# Altium PCB EmphaseMainBoard.PcbDoc (part 2 of 2)
Units mm, origin at the board's own origin, x right, y up, seen from the top; angles counter-clockwise.
Board outline 150 x 110 mm, 2 copper layers (Top Layer, Bottom Layer); 138 components, 156 nets, 586 pads, 141 vias.
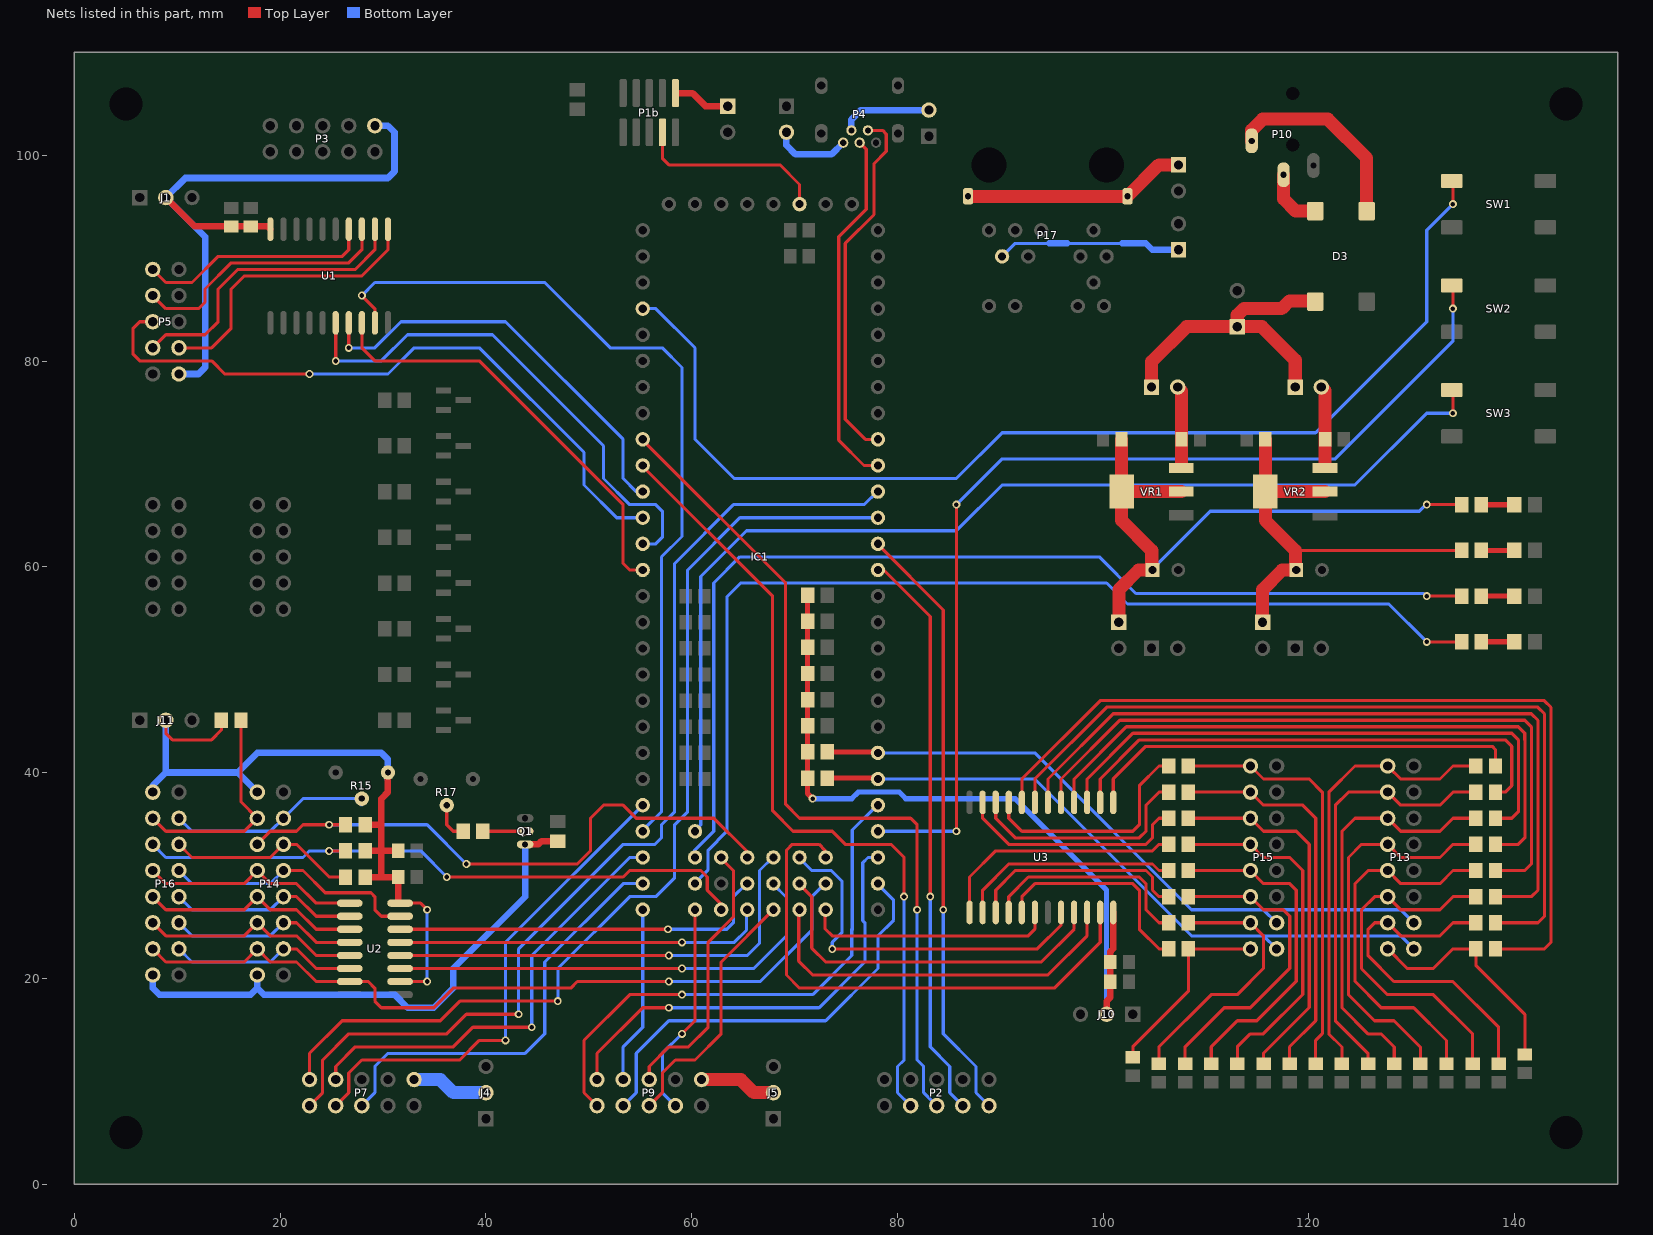
[diagram p2: the nets of this part, all layers, seen from the top]

## Via types
v1: diameter 0.762, hole 0.457, Top Layer to Bottom Layer, 139 vias
v2: diameter 1.27, hole 0.762, Top Layer to Bottom Layer, 1 vias
v3: diameter 0.457, hole 0.457, Top Layer to Bottom Layer, 1 vias

## Nets (pads, with @x,y where several pads share a name; then routed paths per layer and width w, separated by ;. In a path a pad name is that pad's centre, name@x,y a point inside that pad or via, vN(x,y) a via of type N, cw(c..) or ccw(c..) an arc to the next point about the centre after c; other vN are vias at no path point) (continued)
KEY_6: IC1.48 P13.14 P15.14 R7.2 | length 65.5
  Top Layer w0.508: R7.2@73.165,42.005 IC1.48@77.93,42.005
  Bottom Layer w0.305: IC1.48@78.105,41.91 93.345,41.91 108.585,26.67 115.57,26.67 ; P15.14@116.855,25.4 116.84,25.4 115.57,26.67 ; P13.14@130.19,25.4 128.92,26.67 115.57,26.67
KEY_7: IC1.49 P13.16 P15.16 R9.2 | length 65.5
  Top Layer w0.508: R9.2@73.165,39.465 IC1.49@77.93,39.465
  Bottom Layer w0.305: IC1.49@78.105,39.37 93.345,39.37 108.585,24.13 115.57,24.13 ; P15.16@116.855,22.86 116.84,22.86 115.57,24.13 ; P13.16@130.19,22.86 128.92,24.13 115.57,24.13
LCD1_E: IC1.66 P14.12 R22.2 | length 58.2
  Top Layer w0.305: P14.12@17.78,33.02 19.05,34.29 21.59,34.29 22.225,34.925 v1(24.765,34.925) R22.2@26.355,34.925 ; v1(38.1,31.115) 48.895,31.115 50.165,32.385 50.165,35.56 51.435,36.83 53.34,36.83 54.61,35.56 62.15,35.56 65.325,32.385 IC1.66@65.325,31.75
  Bottom Layer w0.305: v1(24.765,34.925) 34.29,34.925 v1(38.1,31.115)
LCD2_E: IC1.67 P16.12 R21.2 | length 61.6
  Top Layer w0.305: v1(24.765,32.385) R21.2@26.355,32.385 ; v1(36.195,29.845) 53.34,29.845 53.975,30.48 60.88,30.48 61.515,29.845 61.515,28.575 62.785,27.305 IC1.67@62.785,26.67
  Bottom Layer w0.305: P16.12@7.62,33.02 8.89,31.75 22.225,31.75 22.86,32.385 v1(24.765,32.385) 33.655,32.385 v1(36.195,29.845)
LCD_B-: P14.2 P16.2 Q1.1 R14.1 | length 54
  Top Layer w0.635: Q1.1@43.815,33.02 45.085,33.02 45.405,33.34 R14.1@46.99,33.34
  Bottom Layer w0.635: P16.2@7.62,20.32 7.62,19.05 8.255,18.415 17.145,18.415 17.78,19.05 ; P14.2@17.78,20.32 17.78,19.05 ; Q1.1@43.815,33.02 43.815,27.94 36.83,20.955 36.83,19.05 34.925,17.145 32.385,17.145 31.115,18.415 18.415,18.415 17.78,19.05
LCD_D0: P14.9 P16.9 U2.15 | length 25.1
  Top Layer w0.305: P14.9@20.32,30.48 22.225,30.48 24.384,28.321 28.829,28.321 29.21,27.94 29.21,26.67 29.845,26.035 U2.15@31.66,26.035
  Bottom Layer w0.305: P16.9@10.16,30.48 11.43,29.21 19.05,29.21 P14.9@20.32,30.48
LCD_D1: P14.10 P16.10 U2.1 | length 21.5
  Top Layer w0.305: P16.10@7.62,30.48 8.89,29.21 16.51,29.21 P14.10@17.78,30.48 19.05,29.21 21.59,29.21 23.495,27.305 U2.1@26.76,27.305
LCD_D2: P14.7 P16.7 U2.2 | length 18.4
  Top Layer w0.305: P14.7@20.32,27.94 21.59,27.94 23.495,26.035 U2.2@26.76,26.035
  Bottom Layer w0.305: P16.7@10.16,27.94 11.43,26.67 19.05,26.67 P14.7@20.32,27.94
LCD_D3: P14.8 P16.8 U2.3 | length 21.5
  Top Layer w0.305: P16.8@7.62,27.94 8.89,26.67 16.51,26.67 P14.8@17.78,27.94 19.05,26.67 21.59,26.67 23.495,24.765 U2.3@26.76,24.765
LCD_D4: P14.5 P16.5 U2.4 | length 18.4
  Top Layer w0.305: P14.5@20.32,25.4 21.59,25.4 23.495,23.495 U2.4@26.76,23.495
  Bottom Layer w0.305: P16.5@10.16,25.4 11.43,24.13 19.05,24.13 P14.5@20.32,25.4
LCD_D5: P14.6 P16.6 U2.5 | length 21.5
  Top Layer w0.305: P16.6@7.62,25.4 8.89,24.13 16.51,24.13 P14.6@17.78,25.4 19.05,24.13 21.59,24.13 23.495,22.225 U2.5@26.76,22.225
LCD_D6: P14.3 P16.3 U2.6 | length 18.4
  Top Layer w0.305: P14.3@20.32,22.86 21.59,22.86 23.495,20.955 U2.6@26.76,20.955
  Bottom Layer w0.305: P16.3@10.16,22.86 11.43,21.59 19.05,21.59 P14.3@20.32,22.86
LCD_D7: IC1.56 P14.4 P16.4 U2.7 | length 76.4
  Top Layer w0.305: P16.4@7.62,22.86 8.89,21.59 16.51,21.59 P14.4@17.78,22.86 19.05,21.59 21.59,21.59 23.495,19.685 U2.7@26.76,19.685 28.575,19.685 29.21,19.05 29.21,17.78 29.845,17.145 34.925,17.145 36.83,19.05 48.26,19.05 48.895,19.685 v1@57.705,19.685
  Bottom Layer w0.305: v1@57.705,19.685 v1(57.785,19.685) 66.675,19.685 71.675,24.685 71.675,27.94 IC1.56@72.945,29.21
LCD_DRIVER_CL: IC1.62 U2.11 | length 44.4
  Top Layer w0.305: U2.11@31.75,20.955 v1(59.055,20.955)
  Bottom Layer w0.305: v1(59.055,20.955) 66.04,20.955 69.215,24.13 69.215,27.86 IC1.62@67.865,29.21
LCD_DRIVER_OD: IC1.65 U2.14 | length 37
  Top Layer w0.305: U2.14@31.66,24.765 v1(57.705,24.765)
  Bottom Layer w0.305: v1(57.705,24.765) 63.42,24.765 64.055,25.4 64.055,27.94 IC1.65@65.325,29.21
LCD_DRIVER_OE: IC1.64 U2.13 | length 36.1
  Top Layer w0.305: U2.13@31.66,23.495 v1@58.975,23.495
  Bottom Layer w0.305: v1@58.975,23.495 v1(59.055,23.495) 64.135,23.495 65.325,24.685 IC1.64@65.325,26.67
LCD_DRIVER_OS: IC1.63 U2.12 | length 44.3
  Top Layer w0.305: U2.12@31.66,22.225 v1(57.785,22.225)
  Bottom Layer w0.305: v1(57.785,22.225) 65.405,22.225 66.595,23.415 66.595,30.48 IC1.63@67.865,31.75
LCD_RS: P14.14 P16.14 R20.2 | length 21.4
  Top Layer w0.305: P16.14@7.62,35.56 8.89,34.29 16.51,34.29 P14.14@17.78,35.56 16.19,37.15 R20.2@16.19,45.085
LCD_RW: P14.11 P16.11 R19.2 | length 18.6
  Top Layer w0.305: P16.11@10.16,33.02 11.43,31.75 19.05,31.75 P14.11@20.32,33.02 21.59,33.02 24.765,29.845 R19.2@26.355,29.845
LCD_V0: P14.13 P16.13 R15.W | length 19.9
  Bottom Layer w0.305: P16.13@10.16,35.56 11.43,34.29 19.05,34.29 P14.13@20.32,35.56 22.225,37.465 27.305,37.465 R15.W@27.94,36.83
LINE_0: R23.2 U3.1 | length 42.5
  Top Layer w0.305: U3.1@100.98,37.1 100.98,39.385 104.14,42.545 137.81,42.545 137.81,42.54 138.125,42.225 R23.2@138.125,40.64
LINE_1: R24.2 U3.2 | length 49.8
  Top Layer w0.305: U3.2@99.71,37.1 99.71,39.37 103.52,43.18 139.08,43.18 139.715,42.545 139.715,38.735 139.08,38.1 R24.2@138.125,38.1
LINE_2: R25.2 U3.3 | length 55.8
  Top Layer w0.305: U3.3@98.44,37.1 98.44,39.37 102.885,43.815 139.715,43.815 140.35,43.18 140.35,36.195 139.715,35.56 R25.2@138.125,35.56
LINE_3: R26.2 U3.4 | length 61.7
  Top Layer w0.305: U3.4@97.17,37.1 97.17,39.37 102.25,44.45 140.335,44.45 140.97,43.815 140.97,43.18 140.985,43.165 140.985,33.655 140.35,33.02 R26.2@138.125,33.02
LINE_4: R27.2 U3.5 | length 67.7
  Top Layer w0.305: U3.5@95.9,37.1 95.9,39.37 101.615,45.085 140.97,45.085 141.62,44.435 141.62,31.115 140.985,30.48 R27.2@138.125,30.48
LINE_5: R28.2 U3.6 | length 73.7
  Top Layer w0.305: U3.6@94.63,37.1 94.63,39.37 100.98,45.72 141.605,45.72 142.255,45.07 142.255,28.575 141.62,27.94 R28.2@138.125,27.94
LINE_6: R29.2 U3.7 | length 79.7
  Top Layer w0.305: U3.7@93.36,37.1 93.36,39.37 100.345,46.355 142.24,46.355 142.89,45.705 142.89,26.035 142.255,25.4 R29.2@138.125,25.4
LINE_7: R30.2 U3.8 | length 85.6
  Top Layer w0.305: U3.8@92.09,37.1 92.09,39.37 99.71,46.99 142.875,46.99 143.525,46.34 143.525,23.495 142.89,22.86 R30.2@138.125,22.86
LINE_8: R31.2 U3.9 | length 22.2
  Top Layer w0.305: U3.9@90.82,36.83 90.82,35.56 92.09,34.29 102.885,34.29 103.52,34.925 103.52,38.735 105.425,40.64 R31.2@106.38,40.64
LINE_9: R32.2 U3.10 | length 22.5
  Top Layer w0.305: U3.10@89.55,37.1 89.55,35.56 91.455,33.655 103.52,33.655 104.155,34.29 104.155,36.83 105.425,38.1 R32.2@106.38,38.1
LINE_10: R33.2 U3.11 | length 22.5
  Top Layer w0.305: U3.11@88.28,37.1 88.28,35.56 90.82,33.02 104.155,33.02 104.79,33.655 104.79,34.925 105.425,35.56 R33.2@106.38,35.56
LINE_11: R34.2 U3.13 | length 24.1
  Top Layer w0.305: U3.13@87.01,26.4 87.01,29.845 89.55,32.385 104.79,32.385 105.425,33.02 R34.2@106.38,33.02
LINE_12: R35.2 U3.14 | length 21.6
  Top Layer w0.305: U3.14@88.28,26.4 88.28,28.575 90.82,31.115 104.79,31.115 105.425,30.48 R35.2@106.38,30.48
LINE_13: R36.2 U3.15 | length 21.6
  Top Layer w0.305: U3.15@89.55,26.4 89.55,28.575 91.455,30.48 104.155,30.48 104.79,29.845 104.79,28.575 105.425,27.94 R36.2@106.38,27.94
LINE_14: R37.2 U3.16 | length 21.2
  Top Layer w0.305: U3.16@90.82,26.4 90.82,27.94 92.725,29.845 103.52,29.845 104.155,29.21 104.155,26.67 105.425,25.4 R37.2@106.38,25.4
LINE_15: R38.2 U3.17 | length 21.2
  Top Layer w0.305: U3.17@92.09,26.4 92.09,27.94 93.36,29.21 102.885,29.21 103.52,28.575 103.52,24.765 105.425,22.86 R38.2@106.38,22.86
LINE_A: IC1.57 U3.23 | length 52.8
  Top Layer w0.305: IC1.57@72.945,31.75 72.945,32.465 72.39,33.02 69.77,33.02 69.215,32.465 69.215,20.32 70.485,19.05 95.25,19.05 99.71,23.51 U3.23@99.71,26.4
LINE_B: IC1.58 U3.22 | length 37.4
  Top Layer w0.305: IC1.58@70.405,26.67 70.405,21.67 71.755,20.32 94.615,20.32 98.44,24.145 U3.22@98.44,26.4
LINE_C: IC1.59 U3.21 | length 35.8
  Top Layer w0.305: IC1.59@70.405,29.21 71.675,27.94 71.675,22.94 73.025,21.59 93.98,21.59 97.17,24.78 U3.21@97.17,26.4
LINE_D: IC1.60 U3.20 | length 36.6
  Top Layer w0.305: v1(73.66,22.86) 93.599,22.86 95.9,25.161 U3.20@95.9,26.4
  Bottom Layer w0.305: IC1.60@70.405,31.75 71.675,30.48 73.58,30.48 74.596,29.464 74.596,24.431 73.66,23.495 v1(73.66,22.86)
LINE_EN/DIS: IC1.55 U3.18 | length 24.4
  Top Layer w0.305: IC1.55@72.945,26.67 72.945,24.845 73.66,24.13 92.71,24.13 93.36,24.78 U3.18@93.36,26.4
NetC3_2: C3.2 C4.2 J1.2 P3.10 P5.10 U1.20 | length 61.6
  Top Layer w0.635: J1.2@8.89,95.885 11.695,93.08 C4.2@15.24,93.08 C3.2@17.145,93.08 18.785,93.08 U1.20@19.05,92.815
  Bottom Layer w0.635: P5.10@10.16,78.74 12.065,78.74 12.7,79.375 12.7,92.075 J1.2@8.89,95.885 10.795,97.79 30.48,97.79 31.115,98.425 31.115,102.235 30.48,102.87 P3.10@29.21,102.87
NetC11_2: C11.2 J6.2 VR1.3 | length 7.8
  Top Layer w1.27: J6.2@107.235,77.47 107.605,77.1 C11.2@107.605,72.39 VR1.3@107.605,69.85
NetC12_2: C12.2 C14.1 J7.1 R13.2 VR1.2 VR1.4 | length 59.6
  Top Layer w0.305: v1@131.365,66.04 v1(131.445,66.04) R13.2@134.86,66.04
  Top Layer w1.27: J7.1@101.52,54.61 101.52,57.785 103.425,59.69 104.715,59.69 104.715,61.575 101.795,64.495 VR1.4@101.795,67.31 ; C12.2@101.785,72.39 101.785,67.32 VR1.4@101.795,67.31 ; VR1.2@107.595,67.31 VR1.4@101.795,67.31
  Bottom Layer w0.305: C14.1@104.715,59.71 110.41,65.405 130.73,65.405 v1@131.365,66.04
NetC13_1: C13.1 D3.1 J6.1 J8.1 | length 31.1
  Top Layer w1.27: J6.1@104.695,77.47 104.695,79.93 108.105,83.34 C13.1@113.03,83.34 ; J8.1@118.665,77.47 118.665,80.09 115.415,83.34 C13.1@113.03,83.34 ; D3.1@120.65,85.852 118.11,85.852 117.348,85.09 113.665,85.09 113.03,84.455 C13.1@113.03,83.34
NetC17_2: C17.2 J8.2 VR2.3 | length 7.8
  Top Layer w1.27: J8.2@121.205,77.47 121.565,77.11 VR2.3@121.565,69.85
NetC18_2: C18.2 C20.1 J9.1 R18.2 VR2.2 VR2.4 | length 43.1
  Top Layer w0.305: 118.685,61.575 118.705,61.595 R18.2@134.86,61.595
  Top Layer w1.27: J9.1@115.49,54.61 115.49,57.785 117.395,59.69 118.685,59.69 118.685,61.575 115.765,64.495 VR2.4@115.765,67.31 ; C18.2@115.755,72.39 115.765,72.38 VR2.4@115.765,67.31 ; VR2.2@121.565,67.31 VR2.4@115.765,67.31
NetC23_2: C23.2 P13.1 R23.1 | length 43.3
  Top Layer w0.305: C23.2@123.205,11.695 123.205,13.32 121.935,14.59 121.935,38.1 124.475,40.64 P13.1@127.65,40.64 ; P13.1@127.65,40.473 127.817,40.473 128.92,39.37 132.73,39.37 134,40.64 R23.1@136.225,40.64
NetC24_2: C24.2 P13.3 R24.1 | length 41.7
  Top Layer w0.305: C24.2@125.745,11.695 125.745,12.685 122.57,15.86 122.57,36.83 123.84,38.1 P13.3@127.65,38.1 128.92,36.83 132.73,36.83 134,38.1 R24.1@136.225,38.1
NetC25_2: C25.2 P13.5 R25.1 | length 40
  Top Layer w0.305: C25.2@128.285,11.695 128.285,13.32 127,14.605 125.73,14.605 123.205,17.13 123.205,34.29 124.475,35.56 P13.5@127.65,35.56 128.92,34.29 132.73,34.29 134,35.56 R25.1@136.225,35.56
NetC26_2: C26.2 P13.7 R26.1 | length 38
  Top Layer w0.305: C26.2@130.825,11.695 130.825,13.32 128.27,15.875 126.365,15.875 123.84,18.4 123.84,31.75 125.11,33.02 P13.7@127.65,33.02 128.92,31.75 132.73,31.75 134,33.02 R26.1@136.225,33.02
NetC27_2: C27.2 P13.9 R27.1 | length 36.4
  Top Layer w0.305: C27.2@133.365,11.695 133.365,13.955 130.175,17.145 127.03,17.145 124.475,19.7 124.475,29.21 125.745,30.48 P13.9@127.65,30.48 128.92,29.21 132.73,29.21 134,30.48 R27.1@136.225,30.48
NetC28_2: C28.2 P13.11 R28.1 | length 34.7
  Top Layer w0.305: C28.2@135.905,11.695 135.905,14.59 132.08,18.415 127.635,18.415 125.11,20.94 125.11,26.67 126.38,27.94 P13.11@127.65,27.94 128.92,26.67 132.73,26.67 134,27.94 R28.1@136.225,27.94
NetC29_2: C29.2 P13.13 R29.1 | length 33.7
  Top Layer w0.305: R29.1@136.225,25.4 134,25.4 132.73,24.13 128.92,24.13 P13.13@127.65,25.4 126.38,25.4 125.745,24.765 125.745,22.195 128.255,19.685 133.985,19.685 138.43,15.24 C29.2@138.43,11.43
NetC30_2: C30.2 P13.15 R30.1 | length 22.4
  Top Layer w0.305: P13.15@127.65,22.86 129.555,20.955 132.095,20.955 134,22.86 R30.1@136.225,22.86 136.225,21.255 140.985,16.495 C30.2@140.985,12.595
NetC31_2: C31.2 P15.1 R31.1 | length 40.8
  Top Layer w0.305: R31.1@108.28,40.64 P15.1@114.315,40.64 115.585,39.37 120.03,39.37 121.3,38.1 121.3,14.62 120.65,13.97 120.65,11.71 C31.2@120.665,11.695
NetC32_2: C32.2 P15.3 R32.1 | length 38.4
  Top Layer w0.305: R32.1@108.28,38.1 P15.3@114.315,38.1 115.585,36.83 119.395,36.83 120.665,35.56 120.665,15.89 118.11,13.335 118.11,11.71 C32.2@118.125,11.695
NetC33_2: C33.2 P15.5 R33.1 | length 36
  Top Layer w0.305: R33.1@108.28,35.56 P15.5@114.315,35.56 115.585,34.29 118.76,34.29 120.03,33.02 120.03,17.16 115.585,12.715 C33.2@115.585,11.695
NetC34_2: C34.2 P15.7 R34.1 | length 34.3
  Top Layer w0.305: R34.1@108.28,33.02 P15.7@114.315,33.02 115.585,31.75 118.125,31.75 119.395,30.48 119.395,18.43 115.57,14.605 114.3,14.605 113.045,13.35 C34.2@113.045,11.695
NetC35_2: C35.2 P15.9 R35.1 | length 32.7
  Top Layer w0.305: R35.1@108.28,30.48 P15.9@114.315,30.48 115.585,29.21 118.125,29.21 118.76,28.575 118.76,19.7 114.935,15.875 113.045,15.875 110.505,13.335 C35.2@110.505,11.695
NetC36_2: C36.2 P15.11 R36.1 | length 30.7
  Top Layer w0.305: C36.2@107.965,11.695 107.965,13.35 111.76,17.145 114.3,17.145 118.125,20.97 118.125,26.035 117.49,26.67 115.585,26.67 P15.11@114.315,27.94 R36.1@108.28,27.94
NetC37_2: C37.2 P15.13 R37.1 | length 25.9
  Top Layer w0.305: C37.2@105.425,11.695 105.425,13.35 110.49,18.415 113.03,18.415 115.57,20.955 115.57,24.145 P15.13@114.315,25.4 R37.1@108.28,25.4
NetC38_2: C38.2 P15.15 R38.1 | length 19.4
  Top Layer w0.305: C38.2@102.885,12.33 102.885,13.35 108.28,18.745 R38.1@108.28,22.86 P15.15@114.315,22.86 P15.15@114.315,22.225
NetD1_1: D1.1 R11.1 | length 3.1
  Top Layer w0.508: R11.1@136.76,57.15 D1.1@139.89,57.15
NetD2_1: D2.1 R12.1 | length 3.1
  Top Layer w0.508: R12.1@136.76,52.705 D2.1@139.89,52.705
NetD3_3: D3.3 P10.2 | length 19.4
  Top Layer w1.27: P10.2@114.43,101.4 114.43,102.445 115.49,103.505 121.84,103.505 125.61,99.735 D3.3@125.61,94.57
NetD3_4: D3.4 P10.1 | length 5.9
  Top Layer w1.27: P10.1@117.53,98.1 117.53,95.75 118.71,94.57 D3.4@120.61,94.57
NetD4_1: D4.1 R13.1 | length 3.1
  Top Layer w0.508: R13.1@136.76,66.04 D4.1@139.89,66.04
NetD5_1: D5.1 R18.1 | length 3.1
  Top Layer w0.508: R18.1@136.76,61.595 D5.1@139.89,61.595
NetIC1_4: IC1.4 SW1.1 | length 109.4
  Top Layer w0.305: SW1.1@133.88,97.5 133.985,97.395 v1(133.985,95.25)
  Bottom Layer w0.305: IC1.4@55.165,85.09 IC1.4@55.245,85.09 56.515,85.09 60.325,81.28 60.325,72.39 64.135,68.58 85.725,68.58 90.17,73.025 120.65,73.025 131.445,83.82 131.445,92.71 v1(133.985,95.25)
NetIC1_51: IC1.51 SW2.1 | length 99.7
  Top Layer w0.305: v1(85.725,34.29) v1(85.725,66.04) ; SW2.1@133.88,87.34 133.985,87.235 v1(133.985,85.09)
  Bottom Layer w0.305: IC1.51@78.105,34.29 v1(85.725,34.29) ; v1(85.725,66.04) 90.17,70.485 122.555,70.485 133.985,81.915 v1(133.985,85.09)
NetIC1_71: IC1.71 R12.2 | length 103.6
  Top Layer w0.305: v1@131.365,52.705 v1(131.445,52.705) R12.2@134.86,52.705
  Bottom Layer w0.305: IC1.71@60.245,29.21 61.595,30.56 61.595,32.465 63.42,34.29 63.42,57.07 64.77,58.42 100.33,58.42 102.362,56.388 127.762,56.388 v1(131.445,52.705)
NetIC1_72: IC1.72 R11.2 | length 102.9
  Top Layer w0.305: v1@131.365,57.15 v1(131.445,57.15) R11.2@134.86,57.15
  Bottom Layer w0.305: IC1.72@60.245,31.75 60.245,32.385 62.15,34.29 62.15,58.42 64.69,60.96 99.615,60.96 103.171,57.404 131.191,57.404 v1(131.445,57.15)
NetIC1_73: IC1.73 SW3.1 | length 107
  Top Layer w0.305: SW3.1@133.88,77.18 133.985,77.075 v1(133.985,74.93)
  Bottom Layer w0.305: IC1.73@60.245,34.29 60.88,34.925 60.88,59.055 65.325,63.5 85.725,63.5 90.17,67.945 124.46,67.945 131.445,74.93 v1(133.985,74.93)
NetIC1_76: IC1.76 P1b.4 | length 18.8
  Top Layer w0.305: P1b.4@57.15,102.235 57.15,99.695 57.785,99.06 68.58,99.06 70.485,97.155 IC1.76@70.485,95.25
NetJ4_2: J4.2 P7.10 | length 7.5
  Bottom Layer w1.27: P7.10@33.02,10.16 35.56,10.16 36.83,8.89 J4.2@40.005,8.89
NetJ5_2: J5.2 P9.10 | length 7.5
  Top Layer w1.27: P9.10@60.96,10.16 64.77,10.16 66.04,8.89 J5.2@67.945,8.89
NetJ16_1: J16.1 P17.2 | length 17.9
  Bottom Layer w0.305: P17.2@90.17,90.17 91.44,91.44 94.742,91.44 ; 96.52,91.44 101.854,91.44
  Bottom Layer w0.635: 94.742,91.44 96.52,91.44 ; 101.854,91.44 104.14,91.44 104.775,90.805 J16.1@107.315,90.805
NetJ17_1: J17.1 P17.14 | length 21.6
  Top Layer w1.27: P17.14@87,96.012 P17.14@102.362,96.012 105.41,99.06 J17.1@107.315,99.06
NetJ18_1: J18.1 P1b.1 | length 6
  Top Layer w0.635: P1b.1@58.42,106.045 60.071,106.045 61.341,104.775 63.373,104.775 J18.1@63.754,104.394
NetQ1_2: Q1.2 R16.2 | length 4.8
  Top Layer w0.305: R16.2@39.685,34.29 Q1.2@43.815,34.29 Q1.2@44.45,34.29
NetR16_1: R16.1 R17.W | length 3.8
  Top Layer w0.305: R17.W@36.195,36.83 36.195,34.925 36.83,34.29 R16.1@37.785,34.29
RXD2: IC1.41 P2.4 | length 55.9
  Top Layer w0.305: IC1.41@78.025,59.69 IC1.41@78.105,59.69 78.66,59.69 83.185,55.165 v1(83.185,27.94)
  Bottom Layer w0.305: v1(83.185,27.94) 83.185,13.335 85.09,11.43 85.09,8.89 P2.4@86.36,7.62
RXD3: IC1.10 P2.8 | length 78.4
  Top Layer w0.305: IC1.10@55.165,69.85 67.865,57.15 67.865,36.275 69.85,34.29 73.66,34.29 74.93,33.02 79.375,33.02 80.645,31.75 v1(80.645,27.94)
  Bottom Layer w0.305: v1(80.645,27.94) 80.645,12.065 80.01,11.43 80.01,8.89 P2.8@81.28,7.62
SPARE_P0.4: IC1.38 P7.1 | length 100.3
  Top Layer w0.305: P7.1@22.86,7.62 24.13,8.89 24.13,12.065 26.67,14.605 36.195,14.605 38.1,16.51 v1(43.18,16.51)
  Bottom Layer w0.305: v1(43.18,16.51) 43.18,22.86 53.34,33.02 56.435,33.02 57.07,33.655 57.07,34.925 58.34,36.195 58.34,60.325 64.055,66.04 76.755,66.04 IC1.38@78.025,67.31
SPARE_P0.5: IC1.39 P7.2 | length 97.9
  Top Layer w0.305: P7.2@22.86,10.16 22.86,12.7 26.035,15.875 35.56,15.875 37.465,17.78 v1(46.99,17.78)
  Bottom Layer w0.305: v1(46.99,17.78) 46.99,20.955 53.975,27.94 56.515,27.94 58.34,29.765 58.34,34.925 59.61,36.195 59.61,59.69 64.69,64.77 IC1.39@78.025,64.77
SPARE_P0.22: IC1.24 P7.3 | length 48.6
  Top Layer w0.305: P7.3@25.4,7.62 26.67,8.89 26.67,10.795 27.94,12.065 37.465,12.065 39.37,13.97 v1(41.91,13.97)
  Bottom Layer w0.305: v1(41.91,13.97) 41.91,23.495 IC1.24@55.245,36.83
SPARE_P0.27: IC1.25 P7.4 | length 43.5
  Top Layer w0.305: P7.4@25.4,10.16 25.4,11.43 27.305,13.335 36.83,13.335 38.735,15.24 v1(44.45,15.24)
  Bottom Layer w0.305: v1(44.45,15.24) 44.45,22.225 53.975,31.75 IC1.25@55.165,31.75
SPARE_P0.28: IC1.26 P7.5 | length 41.7
  Bottom Layer w0.305: P7.5@27.94,7.62 29.21,8.89 29.21,11.43 30.48,12.7 43.815,12.7 45.72,14.605 45.72,21.59 53.34,29.21 IC1.26@55.165,29.21
SPARE_P1.24: IC1.61 P9.5 | length 25.2
  Top Layer w0.305: P9.5@55.88,7.62 57.15,8.89 57.15,10.795 58.42,12.065 60.325,12.065 62.865,14.605 62.865,21.59 IC1.61@67.945,26.67
SPARE_P2.8: IC1.50 P9.1 | length 52
  Top Layer w0.305: P9.1@50.8,7.62 49.53,8.89 49.53,13.97 53.975,18.415 v1(59.055,18.415)
  Bottom Layer w0.305: v1(59.055,18.415) 71.755,18.415 75.565,22.225 75.565,24.765 ; 75.612,24.718 75.612,34.417 IC1.50@78.025,36.83
SPARE_P2.11: IC1.52 P9.2 | length 43.6
  Top Layer w0.305: P9.2@50.8,10.16 50.8,12.7 55.245,17.145 v1(57.785,17.145)
  Bottom Layer w0.305: v1(57.785,17.145) 72.39,17.145 76.835,21.59 76.835,25.4 76.628,25.607 76.628,31.242 77.136,31.75 IC1.52@78.025,31.75
SPARE_P2.12: IC1.53 P9.3 | length 42.1
  Bottom Layer w0.305: P9.3@53.34,7.62 54.61,8.89 54.61,12.7 57.785,15.875 73.025,15.875 78.105,20.955 78.105,24.13 79.629,25.654 79.629,27.606 IC1.53@78.025,29.21
SPARE_P2.13: IC1.27 P9.4 | length 16.7
  Bottom Layer w0.305: P9.4@53.34,10.16 53.34,13.335 55.245,15.24 IC1.27@55.245,26.035
SPARE_P4.28: IC1.69 P9.6 | length 26
  Top Layer w0.305: P9.6@55.88,10.795 55.88,11.43 57.785,13.335 59.69,13.335 61.595,15.24 61.595,23.495 64.055,25.955 64.055,30.48 IC1.69@62.785,31.75
SPARE_P4.29: IC1.70 P9.7 | length 20.9
  Top Layer w0.305: v1(59.055,14.605) 60.325,15.875 IC1.70@60.325,26.67
  Bottom Layer w0.305: P9.7@58.42,7.62 57.15,8.89 57.15,12.7 v1(59.055,14.605)
SPI_ADC_CL: P5.1 U1.14 | length 22.9
  Top Layer w0.305: P5.1@7.62,88.9 8.89,87.63 11.43,87.63 13.97,90.17 26.035,90.17 26.67,90.805 U1.14@26.67,92.815
SPI_ADC_CL_A: IC1.13 U1.6 | length 50.2
  Top Layer w0.305: v1(25.4,80.01) U1.6@25.4,83.715
  Bottom Layer w0.305: v1(25.4,80.01) 29.845,80.01 32.385,82.55 40.64,82.55 51.435,71.755 51.435,68.58 53.975,66.04 56.515,66.04 57.15,65.405 57.15,62.865 56.515,62.23 IC1.13@55.245,62.23
SPI_ADC_ID: IC1.12 P5.5 | length 64.8
  Top Layer w0.305: P5.5@7.62,83.82 6.35,83.82 5.715,83.185 5.715,80.645 6.35,80.01 13.335,80.01 14.605,78.74 v1(22.86,78.74)
  Bottom Layer w0.305: v1(22.86,78.74) 30.48,78.74 33.02,81.28 39.37,81.28 49.53,71.12 49.53,67.945 52.705,64.77 IC1.12@55.245,64.77
SPI_ADC_IG: P5.8 U1.11 | length 28.5
  Top Layer w0.305: P5.8@10.16,81.28 13.335,81.28 15.24,83.185 15.24,86.995 16.51,88.265 27.94,88.265 30.48,90.805 U1.11@30.48,92.815
SPI_ADC_IG_A: IC1.23 U1.9 | length 84.9
  Top Layer w0.305: v1(27.94,86.36) 29.21,85.09 U1.9@29.21,83.715
  Bottom Layer w0.305: v1(27.94,86.36) 29.21,87.63 45.72,87.63 52.07,81.28 57.15,81.28 59.055,79.375 59.055,62.945 57.07,60.96 57.07,36.195 IC1.23@55.165,34.29
SPI_ADC_OD: P5.3 U1.13 | length 26
  Top Layer w0.305: P5.3@7.62,86.36 8.89,85.09 12.065,85.09 12.7,85.725 12.7,86.995 15.24,89.535 26.67,89.535 27.94,90.805 U1.13@27.94,92.815
SPI_ADC_OD_A: IC1.11 U1.7 | length 41.1
  Top Layer w0.305: v1(26.67,81.28) U1.7@26.67,83.715
  Bottom Layer w0.305: v1(26.67,81.28) 29.21,81.28 31.75,83.82 41.91,83.82 53.34,72.39 53.34,68.58 54.61,67.31 IC1.11@55.245,67.31
SPI_ADC_OS: P5.7 U1.12 | length 29.4
  Top Layer w0.305: P5.7@7.62,81.28 8.89,82.55 12.7,82.55 13.97,83.82 13.97,86.995 15.875,88.9 27.305,88.9 29.21,90.805 U1.12@29.21,92.815
SPI_ADC_OS_A: IC1.14 U1.8 | length 42
  Top Layer w0.305: U1.8@27.94,83.715 27.94,81.28 29.21,80.01 39.37,80.01 53.34,66.04 53.34,60.325 53.975,59.69 IC1.14@55.245,59.69
TXD2: IC1.40 P2.2 | length 59.1
  Top Layer w0.305: IC1.40@78.025,62.23 84.455,55.8 v1(84.455,26.67)
  Bottom Layer w0.305: v1(84.455,26.67) 84.455,14.605 87.63,11.43 87.63,8.89 P2.2@88.9,7.62
TXD3: IC1.9 P2.6 | length 83
  Top Layer w0.305: IC1.9@55.165,72.39 69.135,58.42 69.135,36.91 70.485,35.56 81.28,35.56 81.915,34.925 v1(81.915,26.67)
  Bottom Layer w0.305: v1(81.915,26.67) 81.915,12.065 82.55,11.43 82.55,8.89 P2.6@83.82,7.62
USB_D_N: IC1.36 P4.2 | length 35.2
  Top Layer w0.305: P4.2@77.127,102.419 78.556,102.419 78.917,102.058 78.917,100.38 77.724,99.187 77.724,94.234 74.93,91.44 74.93,74.342 76.882,72.39 IC1.36@78.025,72.39
USB_D_P: IC1.37 P4.3 | length 35
  Top Layer w0.305: P4.3@76.327,101.219 76.962,100.584 76.962,94.742 74.295,92.075 74.295,72.31 76.755,69.85 IC1.37@78.025,69.85
USB_GND: J14.2 P4.4 | length 9
  Bottom Layer w0.635: P4.4@75.527,102.419 75.527,103.467 76.454,104.394 J14.2@83.058,104.394
USB_SHIELD: J13.2 P4.5 | length 6.9
  Bottom Layer w0.635: 69.215,101.473 69.215,100.965 70.104,100.076 73.584,100.076 P4.5@74.727,101.219
V_CLAV: C15.2 C16.1 J10.2 R2.1 R3.1 R4.1 R5.1 R6.1 R7.1 R8.1 R9.1 U3.24 | length 75
  Top Layer w0.508: R2.1@71.265,57.245 R3.1@71.265,54.705 R4.1@71.265,52.165 R5.1@71.265,49.625 R6.1@71.265,47.085 R8.1@71.265,44.545 R7.1@71.265,42.005 R9.1@71.265,39.465 71.265,37.955 v1(71.755,37.465)
  Top Layer w0.635: J10.2@100.33,16.51 100.33,17.78 100.7,18.15 C16.1@100.7,19.685 C15.2@100.7,21.59 100.7,22.595 100.98,22.875 U3.24@100.98,26.4
  Bottom Layer w0.508: v1(71.755,37.465) 75.565,37.465 76.2,38.1 80.169,38.1 80.804,37.465 91.44,37.465 100.33,28.575 J10.2@100.33,16.51
V_LCD: C21.2 C22.2 J11.2 P14.16 P16.16 R15.CW R19.1 R20.1 R21.1 R22.1 U2.10 U2.16 | length 76
  Top Layer w0.305: J11.2@8.89,45.085 8.89,43.815 9.525,43.18 13.335,43.18 14.29,44.135 R20.1@14.29,45.085 ; U2.10@31.66,19.685 v1(34.29,19.685) ; U2.16@31.66,27.305 33.655,27.305 v1(34.29,26.67)
  Top Layer w0.635: R19.1@28.255,29.845 29.845,29.845 ; R21.1@28.255,32.385 29.845,32.385 ; R22.1@28.255,34.925 29.845,34.925 ; R15.CW@30.48,39.37 30.48,38.1 29.845,37.465 29.845,34.925 ; C22.2@31.485,32.385 29.845,32.385 ; U2.16@31.66,27.305 31.485,27.48 C21.2@31.485,29.845 29.845,29.845 ; 29.845,29.845 29.845,32.385 ; 29.845,32.385 29.845,34.925
  Bottom Layer w0.305: v1(34.29,19.685) v1(34.29,26.67)
  Bottom Layer w0.635: P16.16@7.62,38.1 7.62,38.735 8.89,40.005 ; J11.2@8.89,45.085 8.89,40.005 ; P14.16@17.78,38.1 15.875,40.005 ; R15.CW@30.48,39.37 R15.CW@30.48,40.005 30.48,41.275 29.845,41.91 17.78,41.91 15.875,40.005 ; 8.89,40.005 15.875,40.005
pads on no net: IC1.2 IC1.3 IC1.29 IC1.30 IC1.31 IC1.80 P2.10 P4.0 P4.1 P7.6 P7.7 P7.8 P9.8 P10.0 P10.3 P17.0 P17.6 P17.7 P17.8 P17.9 P17.10 P17.11 P17.12 P17.13 SW1.2 SW2.2 SW3.2 U2.9
copper on no net:
  other v1: 39.37,42.545 81.915,71.12 113.03,77.47 128.27,83.185 128.27,88.265

## Polygon pours and split planes (outlines as drawn)
GND on Bottom Layer "GND" (solid, remove dead copper, pour order 4): 2,108 148,108 148,2 2,2
GND on Top Layer "GND" (solid, remove dead copper, pour order 2): 2,2 2,108 148,108 148,2

## Silkscreen, mask and mechanical layers (free items; w line width, h text height)
Top Overlay:
  region: 95.885,57.15
  region: 95.25,57.15
  lines w0.1: 83.058,100.076 83.058,98.298 84.582,96.774 ; 108.585,92.202 111.125,92.202 ; 108.585,97.79 109.855,97.79
  lines w0.102: 69.215,98.552 69.215,100.584
  lines w0.203: 27.788,43.586 27.788,44.983 ; 85.973,27.95 85.973,30.728
  text "LABS" at 89.154,64.008 h1.52 r90
  text "1226 DTZ" at 92.456,60.452 h1.02 r90
  text "NONLINEAR" at 89.397,55.033 h1.52 r90
  text "Emphase Main Board" at 91.186,54.737 h1.52 r90
  text "V.01 Rev.A" at 92.456,54.737 h1.02 r90
Mechanical 1:
  circle w0.1: c145,105 r2.75
  circle w0.1: c145,5 r2.75
  circle w0.1: c5,5 r2.75
  circle w0.1: c5,105 r2.75
Mechanical 32:
  the board outline again, w0.203

## Text inside footprints (layer, text, board x,y; h text height)
C13: Top Overlay "+" at 113.411,81.407 h0.8 r90
C14: Top Overlay "+" at 101.42,58.94 h0.8
C20: Top Overlay "+" at 115.39,58.94 h0.8
IC1: Top Overlay "LPCXpresso" at 66.548,66.548 h0.8 r90; Top Overlay "1769" at 66.675,73.152 h0.8 r90; Top Overlay "1" at 52.675,92.69 h0.8; Top Overlay "27" at 51.675,25.69 h0.8; Top Overlay "54" at 79.675,25.69 h0.8; Top Overlay "28" at 80.675,92.69 h0.8; Top Overlay "55" at 75.565,26.035 h0.8 r90; Top Overlay "56" at 75.565,28.575 h0.8 r90; Top Overlay "57" at 75.565,31.115 h0.8 r90; Top Overlay "72" at 58.42,31.115 h0.8 r90; Top Overlay "71" at 58.42,28.575 h0.8 r90; Top Overlay "70" at 58.42,26.035 h0.8 r90; Top Overlay "73" at 58.42,33.655 h0.8 r90; Top Overlay "74" at 76.2,92.075 h0.8 r90; Top Overlay "81" at 58.42,92.075 h0.8 r90
P2: Top Overlay "10" at 77.22,7.89 h0.8 r180; Top Overlay "9" at 76.42,10.89 h0.8 r180; Top Overlay "2" at 91.32,7.89 h0.8 r180; Top Overlay "1" at 91.32,10.89 h0.8 r180
P3: Top Overlay "2" at 16.63,102.6 h0.8; Top Overlay "10" at 30.73,102.6 h0.8; Top Overlay "1" at 16.63,99.6 h0.8; Top Overlay "9" at 31.53,99.6 h0.8
P5: Top Overlay "2" at 9.89,91.32 h0.8 r270; Top Overlay "10" at 9.89,77.22 h0.8 r270; Top Overlay "1" at 6.89,91.32 h0.8 r270; Top Overlay "9" at 6.89,76.42 h0.8 r270
P6: Top Overlay "10" at 9.89,54.36 h0.8 r270; Top Overlay "9" at 6.89,53.56 h0.8 r270; Top Overlay "2" at 9.89,68.46 h0.8 r270; Top Overlay "1" at 6.89,68.46 h0.8 r270
P7: Top Overlay "10" at 34.54,9.89 h0.8; Top Overlay "9" at 35.34,6.89 h0.8; Top Overlay "2" at 20.44,9.89 h0.8; Top Overlay "1" at 20.44,6.89 h0.8
P8: Top Overlay "10" at 20.05,54.36 h0.8 r270; Top Overlay "9" at 17.05,53.56 h0.8 r270; Top Overlay "2" at 20.05,68.46 h0.8 r270; Top Overlay "1" at 17.05,68.46 h0.8 r270
P9: Top Overlay "10" at 62.48,9.89 h0.8; Top Overlay "9" at 63.28,6.89 h0.8; Top Overlay "2" at 48.38,9.89 h0.8; Top Overlay "1" at 48.38,6.89 h0.8
P13: Top Overlay "1" at 126.92,43.25 h0.8 r270; Top Overlay "2" at 129.92,43.5 h0.8 r270; Top Overlay "15" at 126.92,21 h0.8 r270; Top Overlay "16" at 129.92,21 h0.8 r270
P14: Top Overlay "1" at 21.05,17.71 h0.8 r90; Top Overlay "2" at 18.05,17.46 h0.8 r90; Top Overlay "15" at 21.05,39.96 h0.8 r90; Top Overlay "16" at 18.05,39.96 h0.8 r90
P15: Top Overlay "1" at 113.585,43.25 h0.8 r270; Top Overlay "2" at 116.585,43.5 h0.8 r270; Top Overlay "15" at 113.585,21 h0.8 r270; Top Overlay "16" at 116.585,21 h0.8 r270
P16: Top Overlay "1" at 10.89,17.71 h0.8 r90; Top Overlay "2" at 7.89,17.46 h0.8 r90; Top Overlay "15" at 10.89,39.96 h0.8 r90; Top Overlay "16" at 7.89,39.96 h0.8 r90